# EAGLE board matrix_main_stencil (EAGLE 9.5.2)
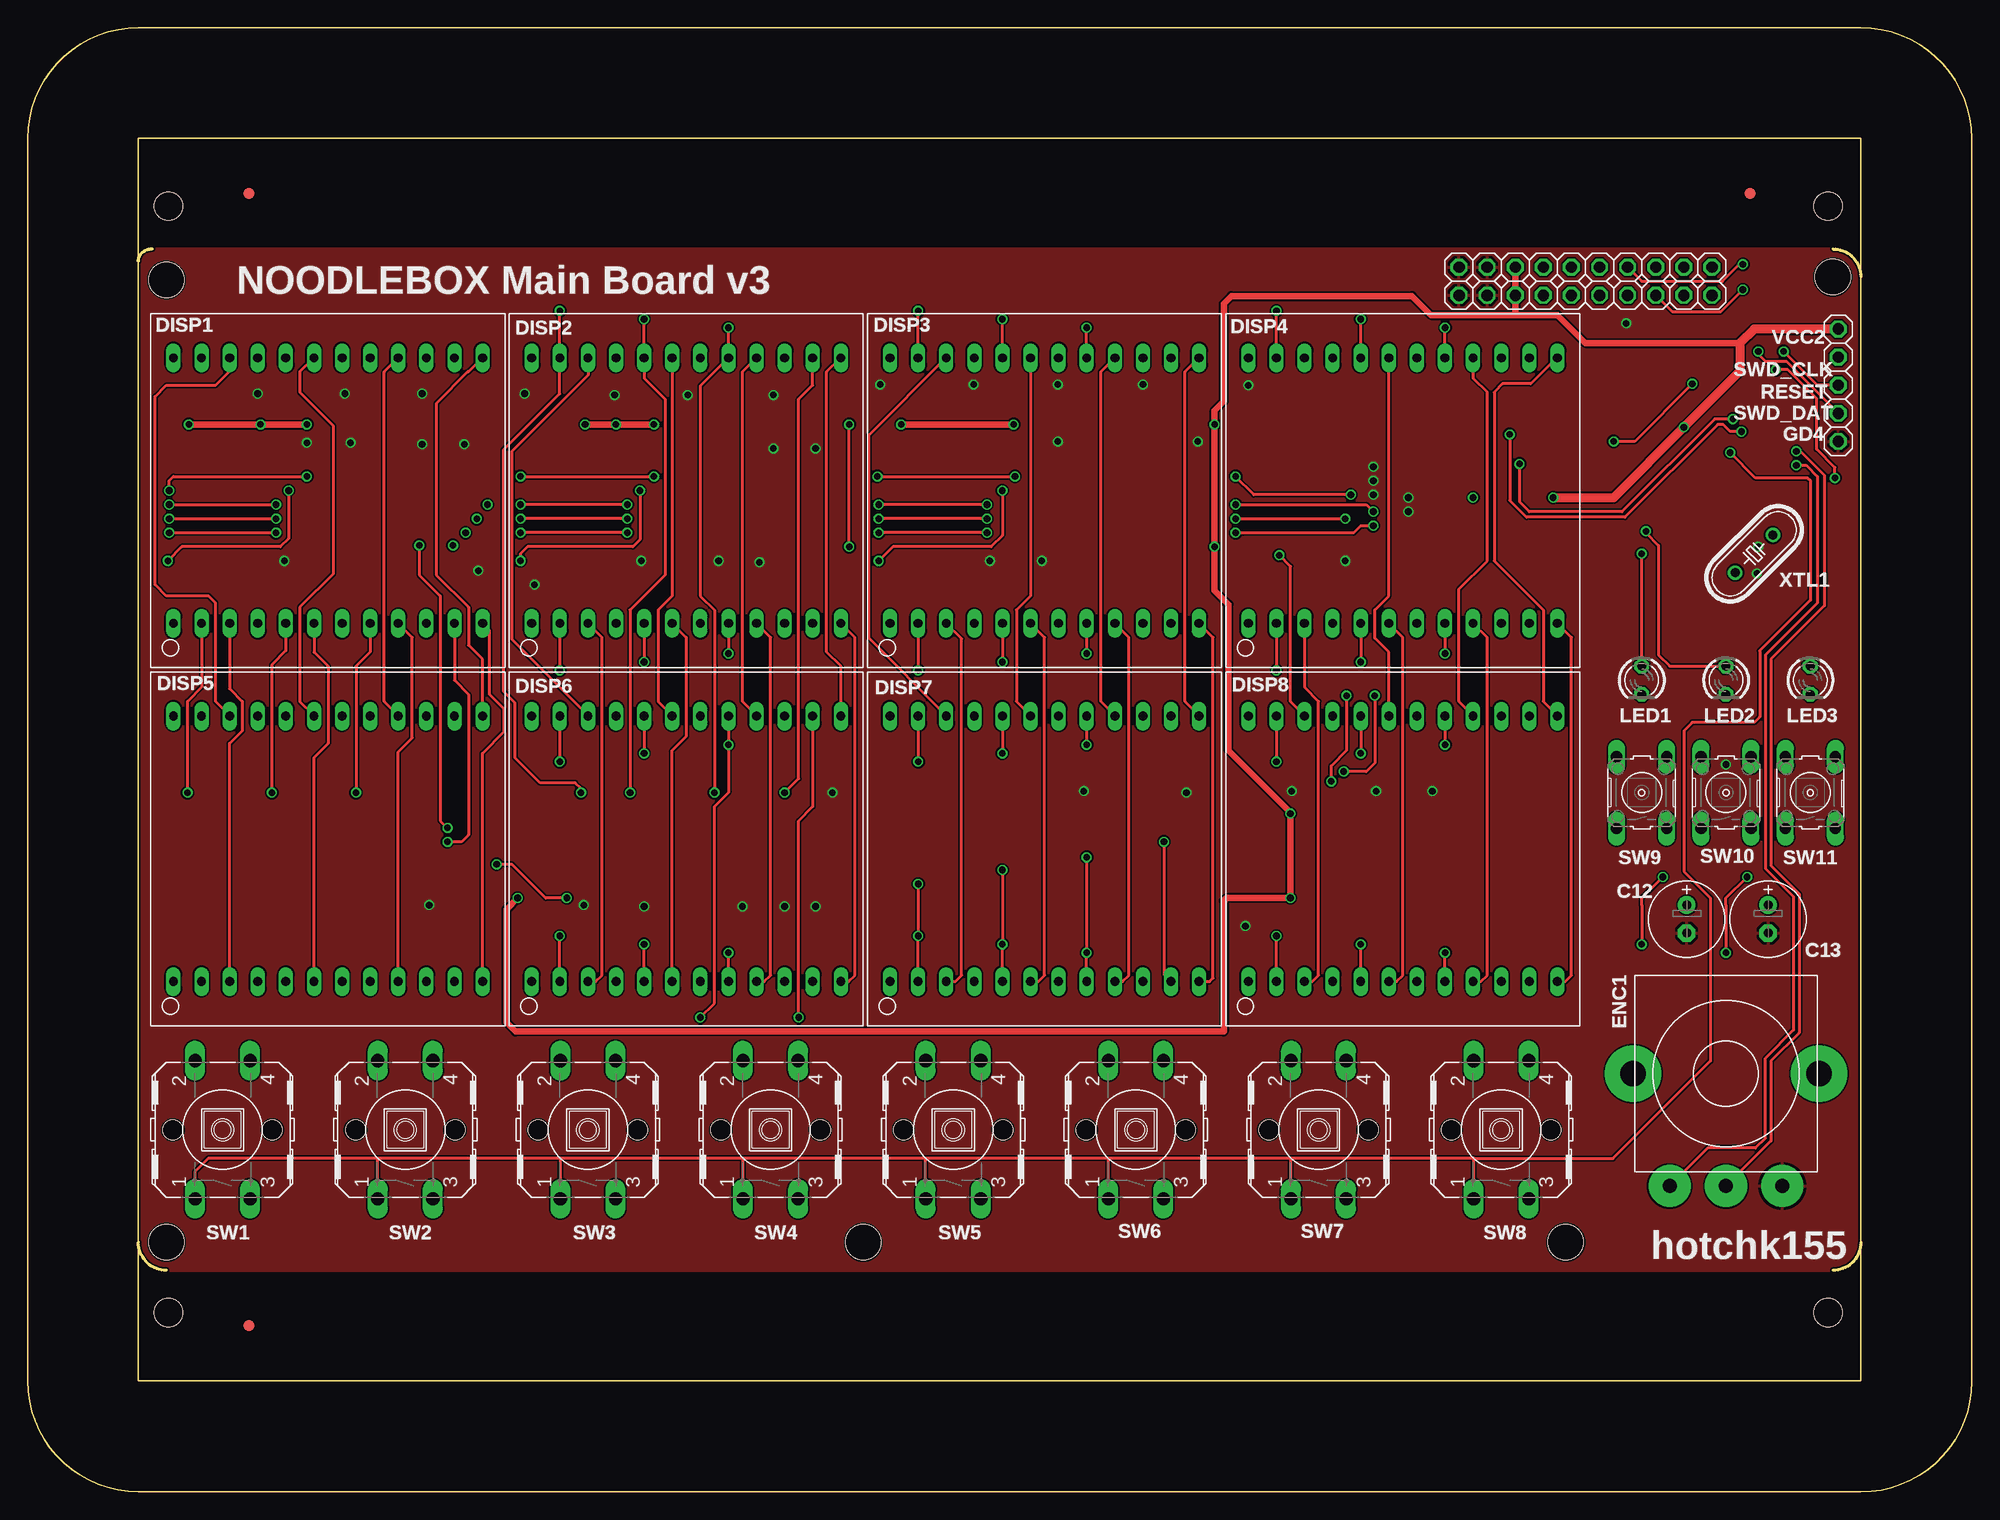
[diagram p0: board, top side]
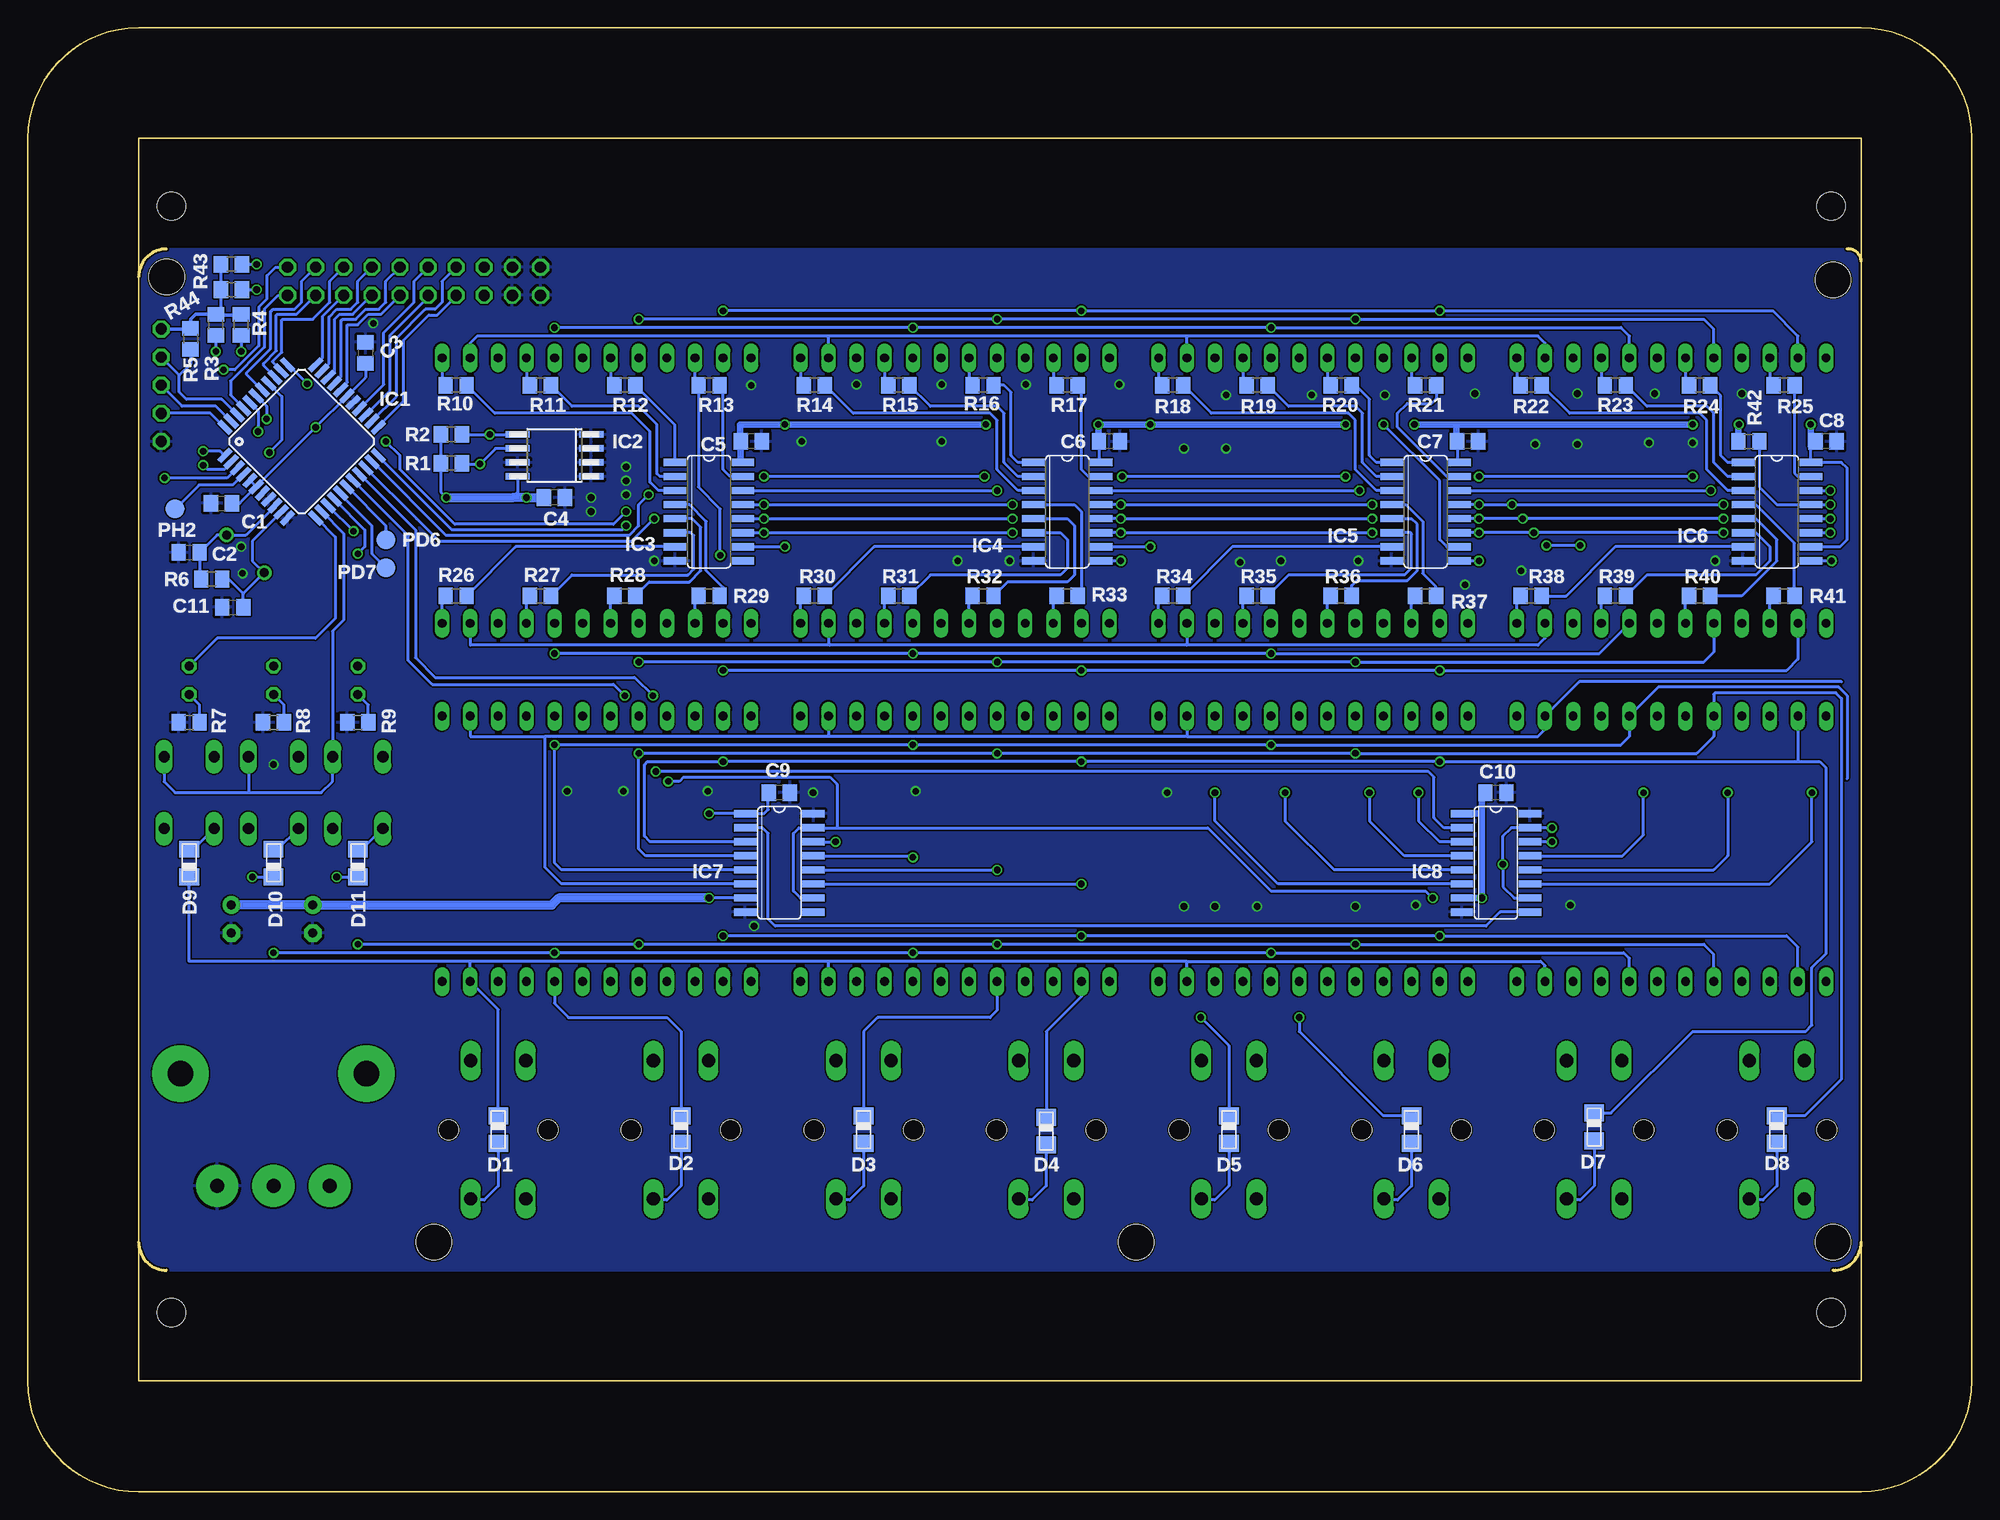
[diagram p1: board, bottom side, seen from below]

Size 175.73 x 132.36 mm. Coordinates in mm from the lower left corner, seen from the top.
Outline: 165.7,22.57 arc-90 163.16,20.03
Outline: 12.54,20.03 arc-90 10,22.57
Outline: 10,111.22 arc-93 11.27,112.36
Outline: 163.16,112.36 arc-90 165.7,109.82
Outline: 0,10.03 0,10.04
Outline: 0,10.04 0,122.35
Outline: 0,122.35 0,122.36
Outline: 175.7,10.03 175.7,122.36
Outline: 10,132.36 165.7,132.36
Outline: 10,0.03 165.7,0.03
Outline: 0,122.35 arc-90 10.01,132.36
Outline: 165.71,132.36 arc-90 175.7,122.34
Outline: 9.99,0.02 arc-90 0,10.04
Outline: 175.73,9.99 arc-90 165.71,0
Outline: 10,122.36 165.7,122.36 165.7,10.03 10,10.03 10,122.36
Copper layers (1*16): Top 0.035mm / dielectric 1.5mm / Bottom 0.035mm
Design rules "hackvana": minimum track width 6mil, minimum drill 0.3mm, track to track 6mil, track to pad 9mil, pad to pad 6mil, via to via 6mil, smd to smd 0mil, copper to edge 6mil, drill to drill 6mil, minimum pad ring 10mil, minimum via ring 6mil, stop-mask expansion 2mil, vias tented up to drill 100mil, thermal gap 10mil
Holes 3.2 mm at 12.54,22.57 12.54,109.56 163.16,109.82 75.53,22.57 139.03,22.57
Holes 2.54 mm at 12.73,116.22 162.73,116.22 162.73,16.22 12.73,16.22

## Footprints (pad centres in the part's own frame; a part is rotated, then mirrored left to right if it is on the bottom)
1X01 = drill 1.016 octagon: 1 0,0
C0805 = smd 1.3 x 1.5: 1 -0.95,0; 2 0.95,0
E2,5-7 = drill 0.813 pad 1.6: + -1.27,0 | drill 0.813 pad 1.6 octagon: - 1.27,0
0805DIODE = smd 1.524 x 1.778: A -1.262,-0.005; C 1.238,-0.005
1388_24PIN = drill 0.8 long: P$1 -13.97,-12; P$2 -11.43,-12; P$3 -8.89,-12; P$4 -6.35,-12; P$5 -3.81,-12; P$6 -1.27,-12; P$7 1.27,-12; P$8 3.81,-12; P$9 6.35,-12; P$10 8.89,-12; P$11 11.43,-12; P$12 13.97,-12; P$13 13.97,12; P$14 11.43,12; P$15 8.89,12; P$16 6.35,12; P$17 3.81,12; P$18 1.27,12; P$19 -1.27,12; P$20 -3.81,12; P$21 -6.35,12; P$22 -8.89,12; P$23 -11.43,12; P$24 -13.97,12
FIDUCIAL_1MM = smd 1 x 1: 1 0,0
ENCODER = drill 1.27 pad 3.81: A 5.08,10.16; B 0,10.16; C -5.08,10.16 | drill 2.286 pad 5.08: P$1 8.4,0; P$2 -8.4,0
TQFP44 = smd 1.5 x 0.5: 1 -5.8,4; 2 -5.8,3.2; 3 -5.8,2.4; 4 -5.8,1.6; 5 -5.8,0.8; 6 -5.8,0; 7 -5.8,-0.8; 8 -5.8,-1.6; 9 -5.8,-2.4; 10 -5.8,-3.2; 11 -5.8,-4; 23 5.8,-4; 24 5.8,-3.2; 25 5.8,-2.4; 26 5.8,-1.6; 27 5.8,-0.8; 28 5.8,0; 29 5.8,0.8; 30 5.8,1.6; 31 5.8,2.4; 32 5.8,3.2; 33 5.8,4 | smd 0.5 x 1.5: 12 -4,-5.8; 13 -3.2,-5.8; 14 -2.4,-5.8; 15 -1.6,-5.8; 16 -0.8,-5.8; 17 0,-5.8; 18 0.8,-5.8; 19 1.6,-5.8; 20 2.4,-5.8; 21 3.2,-5.8; 22 4,-5.8; 34 4,5.8; 35 3.2,5.8; 36 2.4,5.8; 37 1.6,5.8; 38 0.8,5.8; 39 0,5.8; 40 -0.8,5.8; 41 -1.6,5.8; 42 -2.4,5.8; 43 -3.2,5.8; 44 -4,5.8
SO-08M = smd 0.6 x 2.2: 1 -1.905,-3.33; 2 -0.635,-3.33; 3 0.635,-3.33; 4 1.905,-3.33; 5 1.905,3.33; 6 0.635,3.33; 7 -0.635,3.33; 8 -1.905,3.33
SO16 = smd 0.66 x 2.032: 1 -4.445,-3.073; 2 -3.175,-3.073; 3 -1.905,-3.073; 4 -0.635,-3.073; 5 0.635,-3.073; 6 1.905,-3.073; 7 3.175,-3.073; 8 4.445,-3.073; 9 4.445,3.073; 10 3.175,3.073; 11 1.905,3.073; 12 0.635,3.073; 13 -0.635,3.073; 14 -1.905,3.073; 15 -3.175,3.073; 16 -4.445,3.073
LED3MM = drill 0.813 octagon: A -1.27,0; K 1.27,0
TP17R = smd 1.7 x 1.7: TP 0,0
R0805 = smd 1.3 x 1.5: 1 -0.95,0; 2 0.95,0
B3F-40XX = drill 1.194 long: 1 -6.248,2.489; 2 6.248,2.489; 3 -6.248,-2.489; 4 6.248,-2.489 | hole 1.803: 0,-4.496; 0,4.496
B3F-10XX = drill 1.016 long: 1 -3.251,2.261; 2 3.251,2.261; 3 -3.251,-2.261; 4 3.251,-2.261
HC49/S = drill 0.813: 1 -2.413,0; 2 2.413,0

## Placement (x,y rotation side)
AUXIN  [1X01]  149.7,108.17 0 top
C1  [C0805]  158.21,89.37 0 bottom
C2  18p  [C0805]  161.13,84.93 0 bottom
C3  [C0805]  145.19,102.96 270 bottom
C4  [C0805]  128.11,89.88 180 bottom
C5  [C0805]  110.33,94.96 180 bottom
C6  [C0805]  77.95,94.96 180 bottom
C7  [C0805]  45.56,94.96 180 bottom
C8  [C0805]  13.18,94.96 180 bottom
C9  [C0805]  107.79,63.21 180 bottom
C10  [C0805]  43.02,63.21 180 bottom
C11  18p  [C0805]  157.19,79.97 0 bottom
C12  [E2,5-7]  149.95,51.78 270 top
C13  [E2,5-7]  157.32,51.78 270 top
CKOUT  [1X01]  152.24,108.17 90 top
CLKIN  [1X01]  147.16,110.71 90 top
D1  0805DIODE  [0805DIODE]  133.19,32.73 270 bottom
D2  0805DIODE  [0805DIODE]  116.68,32.73 270 bottom
D3  0805DIODE  [0805DIODE]  100.17,32.73 270 bottom
D4  0805DIODE  [0805DIODE]  83.66,32.6 270 bottom
D5  0805DIODE  [0805DIODE]  67.15,32.73 270 bottom
D6  0805DIODE  [0805DIODE]  50.64,32.73 270 bottom
D7  0805DIODE  [0805DIODE]  34.13,32.98 270 bottom
D8  0805DIODE  [0805DIODE]  17.62,32.73 270 bottom
D9  0805DIODE  [0805DIODE]  161.13,56.86 90 bottom
D10  0805DIODE  [0805DIODE]  153.51,56.86 90 bottom
D11  0805DIODE  [0805DIODE]  145.89,56.86 90 bottom
DISP1  1388BBMATRIX24PIN  [1388_24PIN]  27.14,90.52 0 top
DISP2  1388BBMATRIX24PIN  [1388_24PIN]  59.53,90.52 0 top
DISP3  1388BBMATRIX24PIN  [1388_24PIN]  91.92,90.52 0 top
DISP4  1388BBMATRIX24PIN  [1388_24PIN]  124.3,90.52 0 top
DISP5  1388BBMATRIX24PIN  [1388_24PIN]  27.14,58.13 0 top
DISP6  1388BBMATRIX24PIN  [1388_24PIN]  59.53,58.13 0 top
DISP7  1388BBMATRIX24PIN  [1388_24PIN]  91.92,58.13 0 top
DISP8  1388BBMATRIX24PIN  [1388_24PIN]  124.3,58.13 0 top
E$1  [FIDUCIAL_1MM]  20,117.36 0 top
E$2  [FIDUCIAL_1MM]  155.7,117.36 0 top
E$3  [FIDUCIAL_1MM]  20,15.03 0 top
ENC1  ENCODER  [ENCODER]  153.51,37.81 180 top
G1  [1X01]  139.54,110.71 90 top
G2  [1X01]  142.08,110.71 90 top
G3  [1X01]  144.62,108.17 90 top
G4  [1X01]  142.08,108.17 90 top
GD1  [1X01]  131.92,110.71 0 top
GD2  [1X01]  129.38,110.71 0 top
GD3  [1X01]  129.38,108.17 0 top
GD4  [1X01]  163.67,94.96 0 top
GD5  [1X01]  131.92,108.17 0 top
GX  [1X01]  139.54,108.17 90 top
IC1  MKE02_44PIN  [TQFP44]  150.97,94.96 45 bottom
IC2  24AA01SM  [SO-08M]  128.11,93.69 90 bottom
IC3  74HC595D  [SO16]  114.14,88.61 270 bottom
IC4  74HC595D  [SO16]  81.76,88.61 270 bottom
IC5  74HC595D  [SO16]  49.37,88.61 270 bottom
IC6  74HC595D  [SO16]  17.62,88.61 270 bottom
IC7  NPIC6C596  [SO16]  107.79,56.86 270 bottom
IC8  NPIC6C596  [SO16]  43.02,56.86 270 bottom
LED1  [LED3MM]  145.89,73.37 270 top
LED2  [LED3MM]  153.51,73.37 270 top
LED3  [LED3MM]  161.13,73.37 270 top
OFFSW  [1X01]  152.24,110.71 90 top
PD6  TPTP17R  [TP17R]  143.35,86.07 0 bottom
PD7  TPTP17R  [TP17R]  143.35,83.53 0 bottom
PH2  TPTP17R  [TP17R]  162.4,88.86 0 bottom
PWRCTL  [1X01]  149.7,110.71 90 top
R1  4k7  [R0805]  137.44,92.99 180 bottom
R2  4k7  [R0805]  137.44,95.59 180 bottom
R3  [R0805]  158.72,105.5 90 bottom
R4  [R0805]  156.43,105.5 90 bottom
R5  [R0805]  161,104.23 90 bottom
R6  [R0805]  159.1,82.51 180 bottom
R7  [R0805]  161.13,69.56 0 bottom
R8  [R0805]  153.51,69.56 0 bottom
R9  [R0805]  145.89,69.56 0 bottom
R10  [R0805]  137,100.04 0 bottom
R11  [R0805]  129.38,100.04 0 bottom
R12  [R0805]  121.76,100.04 0 bottom
R13  [R0805]  114.14,100.04 0 bottom
R14  [R0805]  104.62,100.04 0 bottom
R15  [R0805]  97,100.04 0 bottom
R16  [R0805]  89.38,100.04 0 bottom
R17  [R0805]  81.76,100.04 0 bottom
R18  [R0805]  72.23,100.04 0 bottom
R19  [R0805]  64.61,100.04 0 bottom
R20  [R0805]  56.99,100.04 0 bottom
R21  [R0805]  49.37,100.04 0 bottom
R22  [R0805]  39.84,100.04 0 bottom
R23  [R0805]  32.23,100.04 0 bottom
R24  [R0805]  24.61,100.04 0 bottom
R25  [R0805]  16.98,100.04 0 bottom
R26  [R0805]  137,80.99 0 bottom
R27  [R0805]  129.38,80.99 0 bottom
R28  [R0805]  121.76,80.99 0 bottom
R29  [R0805]  114.14,80.99 0 bottom
R30  [R0805]  104.62,80.99 0 bottom
R31  [R0805]  97,80.99 0 bottom
R32  [R0805]  89.38,80.99 0 bottom
R33  [R0805]  81.76,80.99 0 bottom
R34  [R0805]  72.23,80.99 0 bottom
R35  [R0805]  64.61,80.99 0 bottom
R36  [R0805]  56.99,80.99 0 bottom
R37  [R0805]  49.37,80.99 0 bottom
R38  [R0805]  39.84,80.99 0 bottom
R39  [R0805]  32.23,80.99 0 bottom
R40  [R0805]  24.61,80.99 0 bottom
R41  [R0805]  16.98,80.99 0 bottom
R42  [R0805]  20.16,94.96 180 bottom
R43  4k7  [R0805]  157.32,110.96 180 bottom
R44  4k7  [R0805]  157.32,108.68 180 bottom
RESET  [1X01]  163.67,100.04 0 top
RX  [1X01]  137,110.71 90 top
SCL  [1X01]  144.62,110.71 90 top
SDA  [1X01]  147.16,108.17 90 top
SW1  [B3F-40XX]  17.62,32.73 90 top
SW2  [B3F-40XX]  34.13,32.73 90 top
SW3  [B3F-40XX]  50.64,32.73 90 top
SW4  [B3F-40XX]  67.15,32.73 90 top
SW5  [B3F-40XX]  83.66,32.73 90 top
SW6  [B3F-40XX]  100.17,32.73 90 top
SW7  [B3F-40XX]  116.68,32.73 90 top
SW8  [B3F-40XX]  133.19,32.73 90 top
SW9  [B3F-10XX]  145.89,63.21 90 top
SW10  [B3F-10XX]  153.51,63.21 90 top
SW11  [B3F-10XX]  161.13,63.21 90 top
SWD_CLK  [1X01]  163.67,102.58 0 top
SWD_DAT  [1X01]  163.67,97.5 0 top
TX  [1X01]  137,108.17 90 top
VCC  [1X01]  134.46,110.71 0 top
VCC1  [1X01]  134.46,108.17 0 top
VCC2  [1X01]  163.67,105.12 0 top
XTL1  20m  [HC49/S]  156.05,84.8 45 top

## Library data of the parts
AUXIN CKOUT CLKIN G1-G4 GD1-GD5 GX OFFSW PWRCTL RESET RX SCL SDA SWD_CLK SWD_DAT TX VCC VCC1 VCC2 = pinhead
C1-C13 R1-R44 = rcl
D1-D11 IC7 IC8 = jasons_stuff
DISP1-DISP8 ENC1 IC1 = jason_eagle6
E$1-E$3 = adafruit
IC2 = microchip; MF: MICROCHIP; MPN: 24AA01-I/SN; OC_FARNELL: 1331268; OC_NEWARK: 92C6793
IC3-IC6 = 74xx-eu
LED1-LED3 = led
PD6 PD7 PH2 = testpad
SW1-SW8 = switch-omron; MF: OMRON COMPONENTS USA; MPN: B3F-4000; OC_FARNELL: 176434; OC_NEWARK: 36K3105
SW9-SW11 = switch-omron; MPN: B3F-1000; OC_FARNELL: 176432; OC_NEWARK: 36M3542
XTL1 = crystal; OC_FARNELL: 1667008; OC_NEWARK: unknown

## Nets
+5V: C1.2 C3.2 C4.2 C5.2 C6.2 C7.2 C8.2 C9.2 C10.2 C12.+ C13.+ IC1.5 IC1.6 IC1.28 IC2.8 IC3.10 IC3.16 IC4.10 IC4.16 IC5.10 IC5.16 IC6.10 IC6.16 IC7.1 IC7.7 IC8.1 IC8.7 R1.2 R2.2 R3.2 R4.2 R5.2 R42.2 R43.2 R44.2 VCC1.1 VCC2.1 VCC.1
A0: DISP1.P$22 DISP5.P$22 R25.1
A1: DISP1.P$19 DISP5.P$19 R24.1
A2: DISP1.P$16 DISP5.P$16 R23.1
A3: DISP1.P$13 DISP5.P$13 R22.1
A4: DISP1.P$3 DISP5.P$3 R41.1
A5: DISP1.P$6 DISP5.P$6 R40.1
A6: DISP1.P$9 DISP5.P$9 R39.1
A7: DISP1.P$12 DISP5.P$12 R38.1
A8: DISP2.P$22 DISP6.P$22 R21.1
A9: DISP2.P$19 DISP6.P$19 R20.1
A10: DISP2.P$16 DISP6.P$16 R19.1
A11: DISP2.P$13 DISP6.P$13 R18.1
A12: DISP2.P$3 DISP6.P$3 R37.1
A13: DISP2.P$6 DISP6.P$6 R36.1
A14: DISP2.P$9 DISP6.P$9 R35.1
A15: DISP2.P$12 DISP6.P$12 R34.1
A16: DISP3.P$22 DISP7.P$22 R17.1
A17: DISP3.P$19 DISP7.P$19 R16.1
A18: DISP3.P$16 DISP7.P$16 R15.1
A19: DISP3.P$13 DISP7.P$13 R14.1
A20: DISP3.P$3 DISP7.P$3 R33.1
A21: DISP3.P$6 DISP7.P$6 R32.1
A22: DISP3.P$9 DISP7.P$9 R31.1
A23: DISP3.P$12 DISP7.P$12 R30.1
A24: DISP4.P$22 DISP8.P$22 R13.1
A25: DISP4.P$19 DISP8.P$19 R12.1
A26: DISP4.P$16 DISP8.P$16 R11.1
A27: DISP4.P$13 DISP8.P$13 R10.1
A28: DISP4.P$3 DISP8.P$3 R29.1
A29: DISP4.P$6 DISP8.P$6 R28.1
A30: DISP4.P$9 DISP8.P$9 R27.1
A31: DISP4.P$12 DISP8.P$12 R26.1
AUXIN: AUXIN.1 IC1.36
AUXOUT: GX.1 IC1.25
D_ACK: IC1.22 IC3.11 IC4.11 IC5.11 IC6.11
D_ADT: IC1.21 IC6.14
D_ARK: IC1.20 IC3.12 IC4.12 IC5.12 IC6.12
D_ENA: IC1.34 IC3.13 IC4.13 IC5.13 IC6.13 R42.1
D_KCK: IC1.19 IC7.10 IC7.15 IC8.10 IC8.15
D_KDT: IC1.18 IC8.2
ENC1: ENC1.B IC1.1
ENC2: ENC1.A IC1.2
GATE1: G3.1 IC1.31
GATE2: G2.1 IC1.30
GATE3: G4.1 IC1.29
GATE4: G1.1 IC1.26
GND: C1.1 C2.1 C3.1 C4.1 C5.1 C6.1 C7.1 C8.1 C9.1 C10.1 C11.1 C12.- C13.- ENC1.C GD1.1 GD2.1 GD3.1 GD4.1 GD5.1 IC1.8 IC1.11 IC1.27 IC2.1 IC2.2 IC2.3 IC2.4 IC2.7 IC3.8 IC4.8 IC5.8 IC6.8 IC7.8 IC7.16 IC8.8 IC8.16 R7.1 R8.1 R9.1
I2C0SCL: IC1.32 R43.1 SCL.1
I2C0SDA: IC1.33 R44.1 SDA.1
I2C1SCL: IC1.39 IC2.6 R1.1
I2C1SDA: IC1.40 IC2.5 R2.1
K0: DISP1.P$23 DISP2.P$23 DISP3.P$23 DISP4.P$23 IC8.3
K1: DISP1.P$20 DISP2.P$20 DISP3.P$20 DISP4.P$20 IC8.4
K2: DISP1.P$17 DISP2.P$17 DISP3.P$17 DISP4.P$17 IC8.5
K3: DISP1.P$14 DISP2.P$14 DISP3.P$14 DISP4.P$14 IC8.6
K4: DISP1.P$2 DISP2.P$2 DISP3.P$2 DISP4.P$2 IC8.11
K5: DISP1.P$5 DISP2.P$5 DISP3.P$5 DISP4.P$5 IC8.12
K6: DISP1.P$8 DISP2.P$8 DISP3.P$8 DISP4.P$8 IC8.13
K7: DISP1.P$11 DISP2.P$11 DISP3.P$11 DISP4.P$11 IC8.14
K8: D7.A DISP5.P$23 DISP6.P$23 DISP7.P$23 DISP8.P$23 IC7.3
K9: D8.A DISP5.P$20 DISP6.P$20 DISP7.P$20 DISP8.P$20 IC7.4
K10: D6.A DISP5.P$17 DISP6.P$17 DISP7.P$17 DISP8.P$17 IC7.5
K11: D5.A DISP5.P$14 DISP6.P$14 DISP7.P$14 DISP8.P$14 IC7.6
K12: D4.A DISP5.P$2 DISP6.P$2 DISP7.P$2 DISP8.P$2 IC7.11
K13: D3.A D11.A DISP5.P$5 DISP6.P$5 DISP7.P$5 DISP8.P$5 IC7.12
K14: D2.A D10.A DISP5.P$8 DISP6.P$8 DISP7.P$8 DISP8.P$8 IC7.13
K15: D1.A D9.A DISP5.P$11 DISP6.P$11 DISP7.P$11 DISP8.P$11 IC7.14
KEY_READ1: IC1.37 SW1.1 SW2.1 SW3.1 SW4.1 SW5.1 SW6.1 SW7.1 SW8.1
KEY_READ2: IC1.13 SW9.4 SW10.4 SW11.4
LED1: IC1.12 LED3.A
LED2: IC1.14 LED2.A
LED3: IC1.15 LED1.A
MIDIRX: IC1.24 RX.1
MIDITX: IC1.23 TX.1
N$1: D10.C SW10.1
N$2: LED3.K R7.2
N$3: LED2.K R8.2
N$4: C2.2 IC1.9 R6.2 XTL1.2
N$5: C11.2 IC1.10 R6.1 XTL1.1
N$6: LED1.K R9.2
N$7: D9.C SW11.1
N$8: D11.C SW9.1
N$9: D7.C SW2.3
N$11: D8.C SW1.3
N$13: D6.C SW3.3
N$14: D5.C SW4.3
N$16: D4.C SW5.3
N$17: IC6.15 R25.2
N$18: IC6.1 R24.2
N$19: IC6.2 R23.2
N$20: IC6.3 R22.2
N$21: IC6.4 R41.2
N$22: IC6.5 R40.2
N$23: IC6.6 R39.2
N$24: IC6.7 R38.2
N$30: IC5.14 IC6.9
N$31: IC4.14 IC5.9
N$32: IC3.14 IC4.9
N$49: IC5.15 R21.2
N$50: IC5.1 R20.2
N$51: IC5.2 R19.2
N$52: IC5.3 R18.2
N$53: IC5.4 R37.2
N$54: IC5.5 R36.2
N$55: IC5.6 R35.2
N$56: IC5.7 R34.2
N$60: D3.C SW6.3
N$61: D2.C SW7.3
N$62: D1.C SW8.3
N$81: IC4.15 R17.2
N$82: IC4.1 R16.2
N$83: IC4.2 R15.2
N$84: IC4.3 R14.2
N$85: IC4.4 R33.2
N$86: IC4.5 R32.2
N$87: IC4.6 R31.2
N$88: IC4.7 R30.2
N$113: IC3.15 R13.2
N$114: IC3.1 R12.2
N$115: IC3.2 R11.2
N$116: IC3.3 R10.2
N$117: IC3.4 R29.2
N$118: IC3.5 R28.2
N$119: IC3.6 R27.2
N$120: IC3.7 R26.2
N$122: IC7.2 IC8.9
NRESET: IC1.43 R3.1 RESET.1
OFF_SW: IC1.3 OFFSW.1
PTD6: IC1.17 PD6.TP
PTD7: IC1.16 PD7.TP
PTH2: IC1.4 PH2.TP
PWR_CTRL: IC1.38 PWRCTL.1
SWDCLK: IC1.42 R5.1 SWD_CLK.1
SWDIO: IC1.44 R4.1 SWD_DAT.1
SYNCIN: CLKIN.1 IC1.35
SYNCOUT: CKOUT.1 IC1.41

## Tracks (layer width: path | path; a pad name or v marks a point on that pad's centre or on a via)
+5V  (via drill 0.6, 0.6 pad 0.25)
  Top 0.254: v74.26,85.44 v74.26,96.48 | v53.18,96.48 50.89,96.48
  Top 0.61: v14.57,96.48 v21.05,96.48 v25.24,96.48 | v50.39,96.48 v53.18,96.48 v56.61,96.48 | v78.96,96.48 v89.12,96.48 | v44.29,53.69 43.27,52.67 43.27,42.45 44.1,41.62 108.11,41.62 108.11,53.43 108.36,53.69 v114.14,53.69 v114.14,61.3 114.14,61.43 108.55,67.02 108.55,80.23 107.28,81.5 v107.28,85.44 v107.28,96.48 107.28,97.75 108.11,98.58 108.11,107.41 108.81,108.11 125.12,108.11 126.84,106.39 134.46,106.39 | 134.46,106.39 138.27,106.39 140.81,103.85 154.78,103.85 | VCC.1 VCC1.1 134.46,106.39
  Top 0.813: v137.89,89.88 143.35,89.88 v149.7,96.23 154.78,101.31 154.78,103.85 156.05,105.12 VCC2.1
  Bottom 0.254: C6.2 78.9,93.27 IC4.16 | C7.2 46.51,93.27 IC5.16 | 14.55,94.54 IC6.16 11.78,93.05 11.27,92.55 11.27,86.07 11.91,85.44 IC6.10 | IC7.7 v114.14,53.69 | v114.14,61.3 IC7.1 109.19,61.3 108.81,61.69 108.81,63.14 C9.2 | IC4.10 v74.26,85.44 | C8.2 14.55,94.96 | IC3.10 v107.28,85.44 | IC5.10 47.47,85.44 48.1,86.07 48.1,91.4 v53.18,96.48 | IC1.6 156.56,89.37 C1.2 | IC1.5 | IC1.5 IC1.6 | IC2.8 131.44,90.36 131.92,89.88 | IC1.6 v149.7,96.23 IC1.28 145.19,100.74 C3.2 | R2.2 R1.2 138.39,90.39 v137.89,89.88 | 156.05,106.39 156.37,106.39 R4.2 | R43.2 R44.2 158.27,106.9 R3.2
  Bottom 0.305: 156.69,106.39 158.66,106.39 | R3.2 160.56,106.45 161,106.01 R5.2 | VCC2.1 161.06,105.12
  Bottom 0.61: 14.55,94.54 14.55,94.96 14.55,96.46 v14.57,96.48 | v25.24,96.48 46.7,96.48 | 46.7,96.48 v50.39,96.48 | C7.2 46.58,95.03 46.58,96.36 46.7,96.48 | v56.61,96.48 v74.26,96.48 v78.96,96.48 78.96,95.03 C6.2 | v89.12,96.48 v107.28,96.48 111.35,96.48 111.35,95.03 C5.2 111.28,93.27 IC3.16 | R42.2 21.11,96.42 v21.05,96.48 | IC8.7 v44.29,53.69 44.29,61.3 | 44.29,61.3 44.29,62.89 C10.2 | IC8.1 44.29,61.3
  Bottom 0.813: R4.2 156.62,106.64 156.62,106.46 156.69,106.39 | 158.66,106.39 R3.2 | 161.06,105.12 R5.2 | v114.14,53.69 127.73,53.69 128.36,53.05 C12.+ C13.+ | v137.89,89.88 131.92,89.88 v130.65,89.88 C4.2
A0
  Top 0.254: DISP5.P$22 18.26,70.19 16.98,71.47 16.98,80.36 16.35,80.99 12.54,80.99 11.52,82.01 11.52,99.02 12.54,100.04 16.98,100.04 18.26,101.31 DISP1.P$22
  Bottom 0.254: DISP1.P$22 18.26,100.36 R25.1
A1
  Top 0.254: DISP5.P$19 25.88,70.19 24.61,71.47 24.61,79.97 27.65,83.02 27.65,96.36 24.61,99.41 24.61,101.25 DISP1.P$19
  Bottom 0.254: DISP1.P$19 25.88,100.36 R24.1
A2
  Top 0.254: DISP5.P$16 33.5,70.19 32.23,71.47 32.23,101.25 DISP1.P$16
  Bottom 0.254: DISP1.P$16 33.5,100.36 R23.1
A3
  Top 0.254: 41.11,70.19 DISP5.P$13 41.11,75.28 39.84,76.55 39.84,79.97 36.92,82.89 36.92,98.39 39.78,101.25 39.84,101.25 DISP1.P$13
  Bottom 0.254: DISP1.P$13 41.11,100.36 R22.1
A4
  Top 0.254: DISP5.P$3 18.26,67.66 19.4,68.8 19.4,71.47 18.26,72.61 DISP1.P$3
  Bottom 0.254: DISP1.P$3 18.26,80.67 R41.1
A5
  Top 0.254: DISP5.P$6 25.88,66.38 27.14,67.66 27.14,74.64 25.88,75.91 DISP1.P$6
  Bottom 0.254: DISP1.P$6 25.88,80.67 R40.1
A6
  Top 0.254: DISP5.P$9 33.5,66.89 34.77,68.16 34.77,77.25 DISP1.P$9
  Bottom 0.254: DISP1.P$9 33.5,80.67 R39.1
A7
  Top 0.254: DISP1.P$12 41.75,77.88 41.75,72.1 43.02,70.83 43.02,68.67 41.11,66.77 DISP5.P$12
  Bottom 0.254: DISP1.P$12 41.11,80.67 R38.1
A8
  Top 0.254: DISP6.P$22 50.64,70.19 43.78,77.05 43.78,94.07 50.64,100.93 DISP2.P$22
  Bottom 0.254: DISP2.P$22 50.64,100.36 R21.1
A9
  Top 0.254: DISP6.P$19 58.26,70.19 56.99,71.47 56.99,79.72 58.26,80.99 DISP2.P$19
  Bottom 0.254: DISP2.P$19 58.26,100.36 R20.1
A10
  Top 0.254: DISP6.P$16 65.88,70.19 64.61,71.47 64.61,101.25 DISP2.P$16
  Bottom 0.254: DISP2.P$16 65.88,100.36 R19.1
A11
  Top 0.254: DISP2.P$13 72.23,101.25 72.23,75.91 73.5,74.64 DISP6.P$13
  Bottom 0.254: DISP2.P$13 73.5,100.36 R18.1
A12
  Top 0.254: DISP6.P$3 51.34,46.13 51.91,46.7 51.91,77.25 DISP2.P$3
  Bottom 0.254: DISP2.P$3 50.64,80.67 R37.1
A13
  Top 0.254: DISP2.P$6 59.53,77.25 59.53,68.29 58.26,67.02 DISP6.P$6
  Bottom 0.254: DISP2.P$6 58.26,80.67 R36.1
A14
  Top 0.254: DISP6.P$9 66.58,46.13 67.15,46.7 67.15,77.25 DISP2.P$9
  Bottom 0.254: DISP2.P$9 65.88,80.67 R35.1
A15
  Top 0.254: DISP6.P$12 74.2,46.13 74.77,46.7 74.77,77.25 DISP2.P$12
  Bottom 0.254: DISP2.P$12 73.5,80.67 R34.1
A16
  Top 0.254: DISP7.P$22 83.03,70.19 76.04,77.18 76.04,95.53 DISP3.P$22
  Bottom 0.254: DISP3.P$22 83.03,100.36 R17.1
A17
  Top 0.254: DISP7.P$19 90.65,70.19 89.38,71.47 89.38,79.72 90.65,80.99 DISP3.P$19
  Bottom 0.254: DISP3.P$19 90.65,100.36 R16.1
A18
  Top 0.254: DISP7.P$16 98.27,70.19 97,71.47 97,101.25 DISP3.P$16
  Bottom 0.254: DISP3.P$16 98.27,100.36 R15.1
A19
  Top 0.254: DISP7.P$13 105.89,70.19 104.62,71.47 104.62,101.25 DISP3.P$13
  Bottom 0.254: DISP3.P$13 105.89,100.36 R14.1
A20
  Top 0.254: DISP7.P$3 83.85,46.13 84.42,46.7 84.42,77.12 DISP3.P$3
  Bottom 0.254: DISP3.P$3 83.03,80.36 82.39,80.99 R33.1
A21
  Top 0.254: DISP7.P$6 91.34,46.13 91.92,46.7 91.92,77.25 DISP3.P$6
  Bottom 0.254: DISP3.P$6 90.65,80.67 R32.1
A22
  Top 0.254: DISP7.P$9 98.97,46.13 99.54,46.7 99.54,77.25 DISP3.P$9
  Bottom 0.254: DISP3.P$9 98.27,80.67 R31.1
A23
  Top 0.254: DISP7.P$12 106.84,46.13 107.16,46.45 107.16,77.25 DISP3.P$12
  Bottom 0.254: DISP3.P$12 105.89,80.67 R30.1
A24  (via drill 0.6 pad 0.25)
  Top 0.254: DISP8.P$22 115.41,70.19 114.14,71.47 114.14,83.66 v113.12,84.67
  Bottom 0.254: DISP4.P$22 115.41,100.04 R13.1 115.09,90.83 113.12,88.86 v113.12,84.67
A25
  Top 0.254: DISP4.P$19 123.03,80.99 121.76,79.72 121.76,77.18 123.03,75.91 DISP8.P$19
  Bottom 0.254: DISP4.P$19 123.03,100.36 R12.1
A26
  Top 0.254: DISP8.P$16 130.65,70.19 129.38,71.47 129.38,81.62 131.92,84.16 131.92,99.41 130.65,100.67 DISP4.P$16
  Bottom 0.254: DISP4.P$16 130.65,100.36 R11.1
A27
  Top 0.254: DISP8.P$13 138.27,70.19 137,71.47 137,79.72 132.56,84.16 132.56,99.41 133.32,100.17 135.86,100.17 138.2,102.52 DISP4.P$13
  Bottom 0.254: DISP4.P$13 138.27,100.36 R10.1
A28
  Top 0.254: DISP8.P$3 116.11,46.13 116.68,46.7 116.68,71.47 115.41,72.73 DISP4.P$3
  Bottom 0.254: DISP4.P$3 115.41,80.67 R29.1
A29
  Top 0.254: DISP8.P$6 123.73,46.13 124.3,46.7 124.3,77.25 DISP4.P$6
  Bottom 0.254: DISP4.P$6 123.03,80.67 R28.1
A30
  Top 0.254: DISP8.P$9 131.35,46.13 131.92,46.7 131.92,77.25 DISP4.P$9
  Bottom 0.254: DISP4.P$9 130.65,80.67 R27.1
A31
  Top 0.254: DISP8.P$12 138.97,46.13 139.54,46.7 139.54,77.25 DISP4.P$12 138.27,78.45
  Bottom 0.254: DISP4.P$12 138.27,80.67 R26.1
AUXIN
  Bottom 0.254: IC1.36 153.37,100.79 154.4,101.82 154.4,102.01 153.26,103.15 153.26,106.39 153.19,106.45 151.41,106.45 AUXIN.1
AUXOUT
  Bottom 0.254: IC1.25 145.14,97.36 142.97,99.53 142.97,104.55 139.54,107.98 GX.1
D_ACK  (via drill 0.6, 0.6 pad 0.25)
  Top 0.254: v12.79,86.7 v22.45,86.7 | v54.2,86.7 v44.54,86.7 | v86.71,86.7 v76.93,86.7 | v109.19,86.7 119.86,86.7 120.49,87.34 v121.63,87.34
  Bottom 0.254: IC6.11 v12.79,86.7 | v22.45,86.7 v39.59,86.7 v44.54,86.7 IC5.11 | v54.2,86.7 v76.93,86.7 IC4.11 | v86.71,86.7 v109.19,86.7 IC3.11 | IC1.22 144.04,93.62 137.38,86.96 122.01,86.96 v121.63,87.34
D_ADT  (via drill 0.6, 0.6 pad 0.25)
  Top 0.254: v12.79,90.52 12.79,91.4 13.18,91.78 v25.24,91.78 | v44.54,91.78 v56.61,91.78 | v76.8,91.78 v89.25,91.78 | v119.6,90.13 110.84,90.13 v109.19,91.78
  Bottom 0.254: IC6.14 v12.79,90.52 | v25.24,91.78 v44.54,91.78 | v56.61,91.78 v76.8,91.78 | v89.25,91.78 v109.19,91.78 | IC1.21 144.56,93.12 137.89,86.45 121.38,86.45 120.49,87.34 120.49,89.25 v119.6,90.13
D_ARK  (via drill 0.6, 0.6 pad 0.25)
  Top 0.254: v12.79,87.97 v22.45,87.97 | v54.2,87.97 v44.54,87.97 | v86.71,87.97 v76.93,87.97 | v109.19,87.97 v119.09,87.97
  Bottom 0.254: IC6.12 v12.79,87.97 | v22.45,87.97 v40.6,87.97 v44.54,87.97 IC5.12 | v54.2,87.97 v76.93,87.97 IC4.12 | v86.71,87.97 v109.19,87.97 IC3.12 | IC1.20 140.59,87.97 140.56,87.97 138.52,85.94 121.12,85.94 v119.09,87.97
D_ENA  (via drill 0.6, 0.6 pad 0.25)
  Top 0.254: v12.79,89.25 v22.45,89.25 22.7,89.25 | v54.2,89.25 v44.54,89.25 | v86.71,89.25 v76.93,89.25 | v109.19,89.25 121,89.25 v121.63,88.61 | v150.46,100.17 145.25,94.96 v143.35,94.96
  Bottom 0.254: v12.79,89.25 IC6.13 17.62,89.25 19.21,90.83 R42.1 | v22.45,89.25 v41.56,89.25 v44.54,89.25 IC5.13 | v54.2,89.25 v76.93,89.25 IC4.13 | v86.71,89.25 v109.19,89.25 IC3.13 | IC1.34 152.19,101.89 v150.46,100.17 | v121.63,88.61 122.78,87.47 137.13,87.47 142.08,92.42 142.08,93.69 v143.35,94.96
D_KCK  (via drill 0.6, 0.6 pad 0.25)
  Top 0.254: v48.73,53.69 46.83,53.69 43.78,56.73 v42.39,56.73 | v35.4,85.56 35.4,82.89 37.3,80.99 37.3,60.67 v37.94,60.03 | v119.22,71.97 119.22,67.02 117.82,65.62 v117.82,64.23
  Bottom 0.254: IC8.10 41.37,53.69 42.39,54.7 v42.39,56.73 42.39,59.27 41.62,60.03 IC8.15 v37.94,60.03 | IC7.10 105.89,53.69 106.52,54.32 106.52,59.53 106.01,60.03 IC7.15 102.58,60.03 | 102.58,60.03 69.06,60.03 63.34,54.32 49.37,54.32 v48.73,53.69 | v35.4,85.56 v38.45,85.56 | 102.58,60.03 102.58,63.97 103.22,64.61 116.43,64.61 116.81,64.23 v117.82,64.23 | IC1.19 145.71,91.99 140.68,86.96 140.68,75.4 138.91,73.62 120.87,73.62 v119.22,71.97
D_KDT  (via drill 0.6 pad 0.25)
  Top 0.254: v121.76,71.97 121.76,65.88 121,65.12 v118.97,65.12
  Bottom 0.254: IC8.2 47.72,60.03 48.61,60.92 48.61,64.61 49.12,65.12 v118.97,65.12 | IC1.18 141.32,86.44 141.32,75.15 139.16,72.99 122.78,72.99 v121.76,71.97
ENC1  (via drill 0.6 pad 0.25)
  Top 0.254: v159.86,94.07 160.24,94.07 162.4,91.91 162.4,80.1 157.57,75.28 157.57,56.61 160.11,54.07 160.11,41.49 157.57,38.95 157.57,31.71 ENC1.B
  Bottom 0.254: IC1.1 157.95,93.69 158.34,94.07 v159.86,94.07
ENC2  (via drill 0.6 pad 0.25)
  Top 0.254: v159.86,92.8 160.75,92.8 161.76,91.78 161.76,80.36 157.07,75.66 157.07,56.35 159.61,53.81 159.61,41.75 157.07,39.21 157.07,31.97 156.18,31.08 151.86,31.08 ENC1.A
  Bottom 0.254: IC1.2 157.33,93.04 157.95,92.42 159.48,92.42 v159.86,92.8
GATE1
  Bottom 0.254: IC1.31 148.57,100.79 148.5,100.79 147.99,101.31 147.99,106.01 147.54,106.45 146.33,106.45 G3.1
GATE2
  Bottom 0.254: IC1.30 148,100.22 147.41,100.8 147.41,105.88 147.29,106.01 146.08,106.01 145.19,106.9 143.98,106.9 143.35,107.53 143.35,109.44 G2.1
GATE3
  Bottom 0.254: IC1.29 147.43,99.7 146.84,100.29 146.84,105.5 145.89,105.5 144.94,106.45 143.79,106.45 G4.1
GATE4
  Bottom 0.254: IC1.26 145.71,97.93 143.54,100.1 143.54,104.8 140.81,107.53 140.81,109.44 G1.1
GND  (via drill 0.6)
  other vias: 23.21,84.16 104.74,63.21 110.08,51.14 119.09,84.16 105.76,94.96 93.12,94.96 91.66,84.16 86.96,84.16 67.4,94.33 55.47,84.16 62.45,84.16 66.13,84.04 25.24,94.83 29.18,94.83 35.65,94.71 50.26,53.05 36.29,53.05 55.72,52.92 71.21,52.92 39.46,94.71 40.73,83.28 45.81,82.01 124.81,89.88 121.63,90.13 121.63,91.4 121.63,92.67 124.81,88.61 144.49,105.63 156.3,83.02 156.43,85.44 72.74,63.21 95.47,63.34 114.27,63.34 121.89,63.34 126.97,63.34 110.33,100.04 100.81,100.1 93.12,100.1 85.5,100.1 77.06,100.1 67.4,99.15 59.66,99.15 53.05,99.15 44.92,99.28 35.65,99.28 28.67,99.28 20.8,99.28 153.51,65.75 71.21,94.33 64.61,52.92 68.42,52.92
  pour Top: 165.7,112.36 10,112.36 10,20.03 165.7,20.03
  pour Bottom: 10,112.36 10,20.03 165.7,20.03 165.7,112.36
I2C0SCL  (via drill 0.6)
  Top 0.254: SCL.1 145.89,109.44 153.19,109.44 154.72,110.96 v155.03,110.96
  Bottom 0.254: IC1.32 149.13,101.37 148.49,102.01 148.49,106.2 147.79,106.9 146.52,106.9 145.89,107.53 145.89,109.44 SCL.1 | R43.1 v155.03,110.96
I2C0SDA  (via drill 0.6)
  Top 0.254: v155.03,108.68 153,106.64 148.68,106.64 SDA.1
  Bottom 0.254: IC1.33 149.06,102.52 149.06,106.26 SDA.1 | R44.1 v155.03,108.68
I2C1SCL  (via drill 0.6)
  Top 0.254: v154.14,96.99 152.49,96.99 144.11,88.61 135.73,88.61 134.84,89.5 v134.84,92.93
  Bottom 0.254: IC1.39 | IC1.39 154.14,98.14 v154.14,96.99 | R1.1 136.43,92.93 v134.84,92.93 133.44,94.33 IC2.6
I2C1SDA  (via drill 0.6)
  Top 0.254: v154.91,95.85 153.89,95.85 153.26,96.48 152.75,96.48 144.37,88.1 135.48,88.1 133.95,89.63 v133.95,95.59
  Bottom 0.254: IC1.40 155.64,98.48 154.91,97.75 v154.91,95.85 | IC2.5 v133.95,95.59 R2.1
K0  (via drill 0.6)
  Top 0.254: DISP4.P$23 v112.87,106.77 | DISP3.P$23 v80.48,106.77 | v48.1,106.77 DISP2.P$23 48.1,99.28 43.02,94.2 43.02,72.35 44.04,71.34 44.04,66.38 46.32,64.1 49.5,64.1 50,63.59 v50,63.21
  Bottom 0.254: IC8.3 48.1,58.77 50,60.67 v50,63.21 | v112.87,106.77 v80.48,106.77 v48.1,106.77 18,106.77 15.71,104.48 DISP1.P$23
K1  (via drill 0.6)
  Top 0.254: DISP4.P$20 v120.49,106.01 | DISP3.P$20 v88.11,106.01 | v55.72,106.01 DISP2.P$20 55.72,100.67 57.62,98.77 57.62,82.89 54.45,79.72 v54.45,63.21
  Bottom 0.254: DISP1.P$20 23.34,105.12 24.22,106.01 v55.72,106.01 v88.11,106.01 v120.49,106.01 | IC8.4 51.28,57.49 54.45,60.67 v54.45,63.21
K2  (via drill 0.6)
  Top 0.254: DISP4.P$17 v128.11,105.25 | DISP3.P$17 v95.73,105.25 | v63.34,105.25 DISP2.P$17 60.8,99.97 60.8,80.99 62.07,79.72 v62.07,63.21
  Bottom 0.254: DISP1.P$17 30.96,104.48 31.72,105.25 v63.34,105.25 v95.73,105.25 v128.11,105.25 | IC8.5 57.62,56.23 62.07,60.67 v62.07,63.21
K3  (via drill 0.6)
  Top 0.254: v68.42,63.21 69.69,64.48 69.69,98.77 70.96,100.04 DISP2.P$14
  Bottom 0.254: DISP1.P$14 38.58,103.85 39.21,104.48 70.96,104.48 | 70.96,104.48 103.34,104.48 | 103.34,104.48 135.09,104.48 135.73,103.85 DISP4.P$14 | IC8.6 62.7,54.95 68.42,60.67 v68.42,63.21 | DISP3.P$14 103.34,104.48 | DISP2.P$14 70.96,104.48
K4  (via drill 0.6)
  Top 0.254: v14.45,63.21 14.45,71.47 15.71,72.73 DISP1.P$2 | DISP4.P$2 v112.87,74.26 | DISP3.P$2 v80.48,74.26 | DISP2.P$2 v48.1,74.26
  Bottom 0.254: DISP1.P$2 15.71,75.28 16.73,74.26 v48.1,74.26 v80.48,74.26 v112.87,74.26 | IC8.11 18.26,54.95 14.45,58.77 v14.45,63.21
K5  (via drill 0.6)
  Top 0.254: DISP4.P$5 v120.49,75.02 | DISP3.P$5 v88.11,75.02 | DISP2.P$5 v55.72,75.02 | DISP1.P$5 23.34,76.04 22.07,74.77 v22.07,63.21
  Bottom 0.254: DISP1.P$5 23.34,75.91 24.22,75.02 v55.72,75.02 v88.11,75.02 v120.49,75.02 | IC8.12 23.34,56.23 22.07,57.49 v22.07,63.21
K6  (via drill 0.6)
  Top 0.254: DISP4.P$8 v128.11,75.78 | DISP3.P$8 v95.73,75.78 | DISP2.P$8 v63.34,75.78 | DISP1.P$8 30.96,75.91 29.68,74.64 v29.68,63.21
  Bottom 0.254: v128.11,75.78 v95.73,75.78 v63.34,75.78 33.69,75.78 DISP1.P$8 | IC8.13 31.59,57.49 29.68,59.4 v29.68,63.21
K7  (via drill 0.6)
  Top 0.254: DISP1.P$11 38.58,73.37 39.84,72.1 39.84,59.4 39.21,58.77 v37.94,58.77
  Bottom 0.254: DISP1.P$11 38.58,77.18 39.21,76.55 70.96,76.55 | 70.96,76.55 103.22,76.55 | 103.22,76.55 135.73,76.55 DISP4.P$11 | DISP3.P$11 103.34,76.67 103.22,76.55 | DISP2.P$11 70.96,76.55 | v37.94,58.77 IC8.14
K8  (via drill 0.6)
  Top 0.254: DISP8.P$23 v112.87,66 | DISP7.P$23 v80.48,66 | DISP6.P$23 v48.1,66
  Bottom 0.254: DISP5.P$23 15.71,66.07 15.65,66 | 15.65,66 v48.1,66 v80.48,66 v112.87,66 119.73,66 119.98,65.75 119.98,59.27 119.47,58.77 IC7.3 | 15.65,66 13.75,66 13.18,65.43 13.18,48.67 14.45,47.4 14.45,42.19 15.02,41.62 25.24,41.62 32.61,34.25 D7.A
K9  (via drill 0.6)
  Top 0.254: DISP8.P$20 v120.49,66.77 | DISP7.P$20 v88.11,66.77 | DISP6.P$20 v55.72,66.77
  Bottom 0.254: IC7.4 119.86,57.49 120.49,58.13 v120.49,66.77 v88.11,66.77 v55.72,66.77 24.86,66.77 23.34,68.29 DISP5.P$20 23.34,72.1 23.21,72.23 12.29,72.23 11.78,71.72 11.78,37.3 15.08,34 17.62,34 D8.A
K10  (via drill 0.6)
  Top 0.254: DISP8.P$17 v128.11,67.53 | DISP7.P$17 v95.73,67.53 | DISP6.P$17 v63.34,67.53 63.34,63.21 62.07,61.94 62.07,44.16 v60.8,42.89
  Bottom 0.254: 11.27,64.48 11.27,71.97 12.03,72.73 28.35,72.73 DISP5.P$17 30.96,68.29 31.72,67.53 v63.34,67.53 v95.73,67.53 v128.11,67.53 128.11,56.86 127.48,56.23 IC7.5 | v60.8,42.89 60.8,41.62 53.17,33.99 D6.A
K11  (via drill 0.6 pad 0.25)
  Top 0.254: DISP6.P$14 70.96,61.94 69.69,60.67 v69.69,42.89
  Bottom 0.254: 70.96,68.29 103.47,68.29 | 103.47,68.29 129,68.29 | DISP8.P$14 135.73,68.29 129,68.29 | DISP7.P$14 103.34,68.42 103.47,68.29 | DISP6.P$14 70.96,68.29 | 70.96,68.29 39.21,68.29 38.58,68.92 DISP5.P$14 35.46,73.24 11.78,73.24 | 129,68.29 129,56.48 127.48,54.95 IC7.6 | D5.A 67.15,40.35 v69.69,42.89
K12  (via drill 0.6)
  Top 0.254: DISP8.P$2 v112.87,50.26 | DISP7.P$2 v80.48,50.26 v80.48,54.95 | DISP6.P$2 v48.1,50.26
  Bottom 0.254: DISP5.P$2 15.71,49.24 16.73,50.26 v48.1,50.26 v80.48,50.26 v112.87,50.26 | IC7.11 v80.48,54.95 | DISP7.P$2 80.48,44.8 83.66,41.62 D4.A
K13  (via drill 0.6)
  Top 0.254: DISP8.P$5 v120.49,49.49 | DISP7.P$5 v88.11,49.49 v88.11,56.23 | DISP6.P$5 v55.72,49.49 | v145.89,49.49 145.89,53.05 145.89,53.69 v147.79,55.59
  Bottom 0.254: DISP5.P$5 23.34,48.6 24.22,49.49 v55.72,49.49 v88.11,49.49 v120.49,49.49 v145.89,49.49 | IC7.12 v88.11,56.23 | DISP7.P$5 88.11,43.52 88.74,42.89 98.9,42.89 100.17,41.62 D3.A | v147.79,55.59 D11.A
K14  (via drill 0.6)
  Top 0.254: DISP8.P$8 v128.11,48.73 | DISP7.P$8 v95.73,48.73 v95.73,57.37 | DISP6.P$8 v63.34,48.73 | v153.51,48.73 153.51,53.05 153.51,53.69 v155.41,55.59
  Bottom 0.254: DISP5.P$8 30.96,48.22 31.46,48.73 v63.34,48.73 v95.73,48.73 v128.11,48.73 v153.51,48.73 | IC7.13 95.85,57.49 v95.73,57.37 | DISP8.P$8 128.11,44.16 126.84,42.89 117.95,42.89 116.68,41.62 D2.A | v155.41,55.59 D10.A
K15  (via drill 0.6)
  Top 0.254: v102.71,58.77 102.71,46.77 DISP7.P$11
  Bottom 0.254: DISP5.P$11 38.58,47.59 38.96,47.97 70.96,47.97 | 70.96,47.97 103.47,47.97 | 103.47,47.97 111.6,47.97 | 111.6,47.97 135.73,47.97 | 135.73,47.97 DISP8.P$11 133.19,43.59 D1.A | DISP6.P$11 70.96,47.97 | 111.61,47.97 111.6,47.97 | DISP7.P$11 103.34,47.84 103.47,47.97 | IC7.14 v102.71,58.77 | 135.73,47.97 161.13,47.97 D9.A
KEY_READ1  (via drill 0.6 pad 0.25)
  Top 0.254: SW1.1 15.13,28.97 16.35,30.19 31.59,30.19 | 31.59,30.19 48.1,30.19 | 48.1,30.19 64.61,30.19 | 64.61,30.19 81.12,30.19 | 81.12,30.19 97.63,30.19 | 97.63,30.19 114.14,30.19 | 114.14,30.19 130.65,30.19 130.7,30.14 | SW2.1 31.64,30.14 31.59,30.19 | SW3.1 48.15,30.14 48.1,30.19 | SW4.1 64.66,30.14 64.61,30.19 | SW5.1 81.17,30.14 81.12,30.19 | SW6.1 97.68,30.14 97.63,30.19 | SW7.1 114.19,30.14 114.14,30.19 | SW8.1 130.7,30.14 | 130.7,30.14 143.3,30.14 152.11,38.95 152.11,53.69 149.7,56.1 149.7,68.8 150.46,69.56 156.05,69.56 156.56,70.07 156.56,76.04 161.13,80.61 161.13,91.4 160.88,91.66 156.18,91.66 v153.89,93.94
  Bottom 0.254: IC1.37 153.92,100.19 152.75,99.02 152.75,95.09 v153.89,93.94
KEY_READ2
  Bottom 0.254: IC1.13 147.16,86.62 147.16,78.83 148.18,77.81 148.18,66.49 SW9.4 148.18,66.44 148.18,64.23 149.19,63.21 155.8,63.21 | SW11.4 163.39,64.2 162.4,63.21 155.8,63.21 | SW10.4 155.77,63.23 155.8,63.21
LED1
  Bottom 0.254: IC1.12 149.63,88.03 147.92,86.32 147.92,78.96 149.7,77.18 158.59,77.18 LED3.A
LED2  (via drill 0.6 pad 0.25)
  Top 0.254: LED2.A 148.43,74.64 147.41,75.66 147.41,85.56 146.27,86.7 v146.27,86.83
  Bottom 0.254: IC1.14 148.57,89.13 v146.27,86.83
LED3  (via drill 0.6 pad 0.25)
  Top 0.254: LED1.A v145.89,84.8
  Bottom 0.254: IC1.15 148,89.7 145.25,86.96 145.25,85.44 v145.89,84.8
MIDIRX
  Bottom 0.254: IC1.24 144.56,96.8 144.56,96.86 142.4,99.02 142.4,104.3 139.79,106.9 138.91,106.9 138.27,107.53 138.27,109.44 RX.1
MIDITX
  Bottom 0.254: IC1.23 144.04,96.3 141.76,98.58 141.76,104.1 139.48,106.39 138.71,106.39 137,108.11 TX.1
N$1
  Bottom 0.254: D10.C 153.11,58.1 SW10.1
N$2
  Bottom 0.254: R7.2 160.18,71.15 LED3.K
N$3
  Bottom 0.254: R8.2 152.56,71.15 LED2.K
N$4
  Bottom 0.254: IC1.9 153.37,89.13 155.99,86.51 XTL1.2 158.6,86.51 C2.2 160.18,82.65 R6.2
N$5
  Bottom 0.254: IC1.10 152.81,88.55 155.41,85.94 155.41,84.16 XTL1.1 156.24,81.19 | C11.2 156.24,81.19 | R6.1 157.56,82.51 156.24,81.19
N$6
  Bottom 0.254: R9.2 144.94,71.15 LED1.K
N$7
  Bottom 0.254: D9.C 160.73,58.1 SW11.1
N$8
  Bottom 0.254: D11.C 145.49,58.1 SW9.1
N$9
  Bottom 0.254: D7.C 34.14,27.64 35.4,26.38 36.52,26.38 SW2.3
N$11
  Bottom 0.254: D8.C 17.62,27.64 18.89,26.38 20.01,26.38 SW1.3
N$13
  Bottom 0.254: D6.C 50.64,27.64 51.91,26.38 53.03,26.38 SW3.3
N$14
  Bottom 0.254: D5.C 67.16,27.64 68.42,26.38 69.54,26.38 SW4.3
N$16
  Bottom 0.254: D4.C 83.67,27.64 84.93,26.38 86.05,26.38 SW5.3
N$17
  Bottom 0.254: R25.2 16.04,92.11 15.71,91.78 IC6.15
N$18
  Bottom 0.254: IC6.1 22.07,93.05 22.7,93.69 22.7,99.08 R24.2
N$19
  Bottom 0.254: IC6.2 22.07,91.78 23.34,93.05 23.34,97.5 23.97,98.14 29.37,98.14 R23.2
N$20
  Bottom 0.254: IC6.3 22.07,90.52 23.97,92.42 23.97,96.86 24.61,97.5 36.36,97.5 R22.2
N$21
  Bottom 0.254: R41.2 16.04,85.75 19.52,89.25 IC6.4
N$22
  Bottom 0.254: IC6.5 19.52,87.97 17.62,86.07 17.62,84.16 20.8,80.99 R40.2
N$23
  Bottom 0.254: IC6.6 19.52,86.7 18.26,85.44 18.26,84.16 19.52,82.89 29.37,82.89 R39.2
N$24
  Bottom 0.254: IC6.7 32.23,85.44 36.67,80.99 R38.2
N$30  (via drill 0.6)
  Top 0.254: v23.59,90.52 23.59,86.2 22.83,85.44 13.94,85.44 v12.67,84.16
  Bottom 0.254: IC5.14 v23.59,90.52 | v12.67,84.16 IC6.9
N$31  (via drill 0.6)
  Top 0.254: v55.34,90.52 55.34,86.07 54.7,85.44 45.18,85.44 44.54,84.8 v44.54,84.16
  Bottom 0.254: IC4.14 v55.34,90.52 | v44.54,84.16 IC5.9
N$32  (via drill 0.6)
  Top 0.254: v88.11,90.52 88.11,86.45 87.09,85.44 78.2,85.44 v76.93,84.16
  Bottom 0.254: IC3.14 v88.11,90.52 | v76.93,84.16 IC4.9
N$49
  Bottom 0.254: IC5.15 47.47,91.78 51.91,96.23 51.91,97.5 51.02,98.39 48.86,98.39 48.42,98.83 R21.2 48.1,99.72
N$50
  Bottom 0.254: IC5.1 53.81,93.05 54.45,93.69 54.45,98.77 55.72,100.04 R20.2
N$51
  Bottom 0.254: IC5.2 53.81,91.78 55.08,93.05 55.08,97.5 55.72,98.14 61.75,98.14 R19.2
N$52
  Bottom 0.254: IC5.3 53.81,90.52 55.72,92.42 55.72,96.86 56.36,97.5 68.74,97.5 R18.2
N$53
  Bottom 0.254: 48.1,81.31 R37.2 48.48,81.05 48.48,81.88 49.62,83.02 49.62,87.72 51.15,89.25 IC5.4
N$54
  Bottom 0.254: IC5.5 50.64,87.97 50.13,87.47 50.13,83.28 51.02,82.39 55.59,82.39 56.04,81.94 R36.2
N$55
  Bottom 0.254: R35.2 61.75,82.89 51.28,82.89 50.64,83.53 50.64,86.58 50.77,86.7 IC5.6
N$56
  Bottom 0.254: IC5.7 66.83,85.44 R34.2
N$60
  Bottom 0.254: D3.C 100.17,27.64 101.44,26.38 102.71,26.38 102.71,26.43 SW6.3
N$61
  Bottom 0.254: D2.C 116.69,27.64 117.95,26.38 119.07,26.38 SW7.3
N$62
  Bottom 0.254: D1.C 133.19,27.64 134.46,26.38 135.58,26.38 SW8.3
N$81
  Bottom 0.254: IC4.15 79.85,91.78 80.48,92.42 80.48,99.72 R17.2
N$82
  Bottom 0.254: IC4.1 86.2,93.05 86.84,93.69 86.84,99.41 87.47,100.04 R16.2
N$83
  Bottom 0.254: IC4.2 86.2,91.78 87.47,93.05 87.47,97.5 88.11,98.14 94.14,98.14 R15.2
N$84
  Bottom 0.254: IC4.3 86.2,90.52 88.11,92.42 88.11,96.86 88.74,97.5 101.12,97.5 R14.2
N$85
  Bottom 0.254: IC4.4 81.12,89.25 80.48,88.61 80.48,81.31 R33.2
N$86
  Bottom 0.254: IC4.5 81.76,87.97 81.12,87.34 81.12,82.89 81.76,82.26 87.16,82.26 R32.2
N$87
  Bottom 0.254: IC4.6 82.39,86.7 81.76,86.07 81.76,83.53 82.39,82.89 94.14,82.89 R31.2
N$88
  Bottom 0.254: IC4.7 99.22,85.44 R30.2
N$113
  Bottom 0.254: IC3.15 112.23,91.78 112.87,92.42 112.87,99.72 R13.2
N$114
  Bottom 0.254: IC3.1 117.21,96.44 R12.2
N$115
  Bottom 0.254: IC3.2 118.59,91.78 118.84,92.04 118.84,96.48 119.86,97.5 120.17,97.82 120.49,98.14 126.53,98.14 R11.2
N$116
  Bottom 0.254: IC3.3 118.71,90.52 119.47,91.28 119.47,95.85 120.49,96.86 120.81,97.18 121.12,97.5 133.51,97.5 R10.2
N$117
  Bottom 0.254: R29.2 112.87,81.31 112.87,81.75 114.39,83.28 114.39,87.72 115.92,89.25 IC3.4
N$118
  Bottom 0.254: R28.2 119.54,82.26 115.92,82.26 114.9,83.28 114.9,87.21 115.66,87.97 IC3.5
N$119
  Bottom 0.254: R27.2 126.53,82.89 116.05,82.89 115.54,83.4 115.54,86.45 115.79,86.7 IC3.6
N$120
  Bottom 0.254: IC3.7 131.6,85.44 R26.2
N$122
  Bottom 0.254: IC8.9 42.64,52.41 43.91,51.14 108.17,51.14 108.81,51.78 108.81,59.53 109.31,60.03 IC7.2
NRESET  (via drill 0.6 pad 0.25)
  Top 0.254: RESET.1 161.76,100.04 v158.72,103.09
  Bottom 0.254: R3.1 v158.72,103.09 | IC1.43 157.38,96.8 158.72,98.14 161.76,98.14 RESET.1
OFF_SW  (via drill 0.6)
  Top 0.254: v163.35,91.66 163.35,92.61 161.7,94.26 161.7,98.83 159.1,101.44 v158.02,101.44
  Bottom 0.254: IC1.3 156.8,92.56 157.7,91.66 v163.35,91.66 | OFFSW.1 153.32,110.71 154.08,109.95 154.08,107.85 154.84,107.09 154.84,103.6 157,101.44 v158.02,101.44
PTD6
  Bottom 0.254: IC1.17 | IC1.17 143.35,87.34 PD6.TP
PTD7
  Bottom 0.254: IC1.16 147.43,90.15 144.62,87.34 144.62,84.8 PD7.TP
PTH2
  Bottom 0.254: IC1.4 156.23,91.99 157.19,91.02 160.24,91.02 PH2.TP
PWR_CTRL
  Bottom 0.254: IC1.38 154.56,99.63 155.92,100.99 155.92,101.18 153.76,103.34 153.76,106.71 153.57,106.9 151.6,106.9 150.97,107.53 150.97,109.44 PWRCTL.1
SWDCLK
  Bottom 0.254: IC1.42 156.8,97.36 158.21,98.77 161.38,98.77 162.02,99.41 162.02,100.93 | 162.02,100.93 SWD_CLK.1 | R5.1 161,101.94 162.02,100.93
SWDIO  (via drill 0.6 pad 0.25)
  Top 0.254: v156.43,103.09 156.43,102.83 157.07,102.2 158.97,102.2 SWD_DAT.1
  Bottom 0.254: IC1.44 157.96,96.23 159.22,97.5 SWD_DAT.1 | R4.1 v156.43,103.09
SYNCIN
  Bottom 0.254: IC1.35 152.81,101.37 153.57,102.14 153.57,102.2 152.75,103.03 152.75,105.94 152.68,106.01 149.95,106.01 148.43,107.53 148.43,109.44 CLKIN.1
SYNCOUT
  Bottom 0.254: IC1.41 156.2,97.97 157.38,99.15 157.38,100.42 154.34,103.47 154.34,106.9 153.06,108.17 CKOUT.1

## Text on the board
tPlace: NOODLEBOX Main Board v3 | hotchk155
_tPlace: DISP1 | DISP3 | DISP4 | DISP2 | DISP5 | DISP6 | DISP7 | DISP8 | ENC1
_bPlace: D9 | D11 | D10 | D8 | D7 | D6 | D5 | D4 | D3 | D2 | D1
_tNames: VCC2 | SWD_CLK | RESET | SWD_DAT | GD4 | XTL1 | LED1 | LED2 | LED3 | SW9 | SW10 | SW11 | C12 | C13 | SW1 | SW2 | SW3 | SW4 | SW5 | SW6 | SW7 | SW8
_bNames: R43 | R4 | R44 | C3 | R3 | R5 | R42 | R16 | R10 | IC1 | C8 | R25 | R24 | R23 | R22 | R21 | R20 | R19 | R18 | R17 | R15 | R14 | R13 | R12 | R11 | R2 | C7 | C5 | IC2 | C6 | R1 | C4 | C1 | IC6 | IC5 | PH2 | IC4 | IC3 | PD6 | C2 | R6 | R40 | R39 | R38 | R36 | R35 | R34 | R32 | R31 | R30 | R28 | R27 | R26 | PD7 | R41 | R37 | R33 | R29 | C11 | R9 | R8 | R7 | C10 | C9 | IC8 | IC7